# Allegro board prototype_board2_rev1.brd
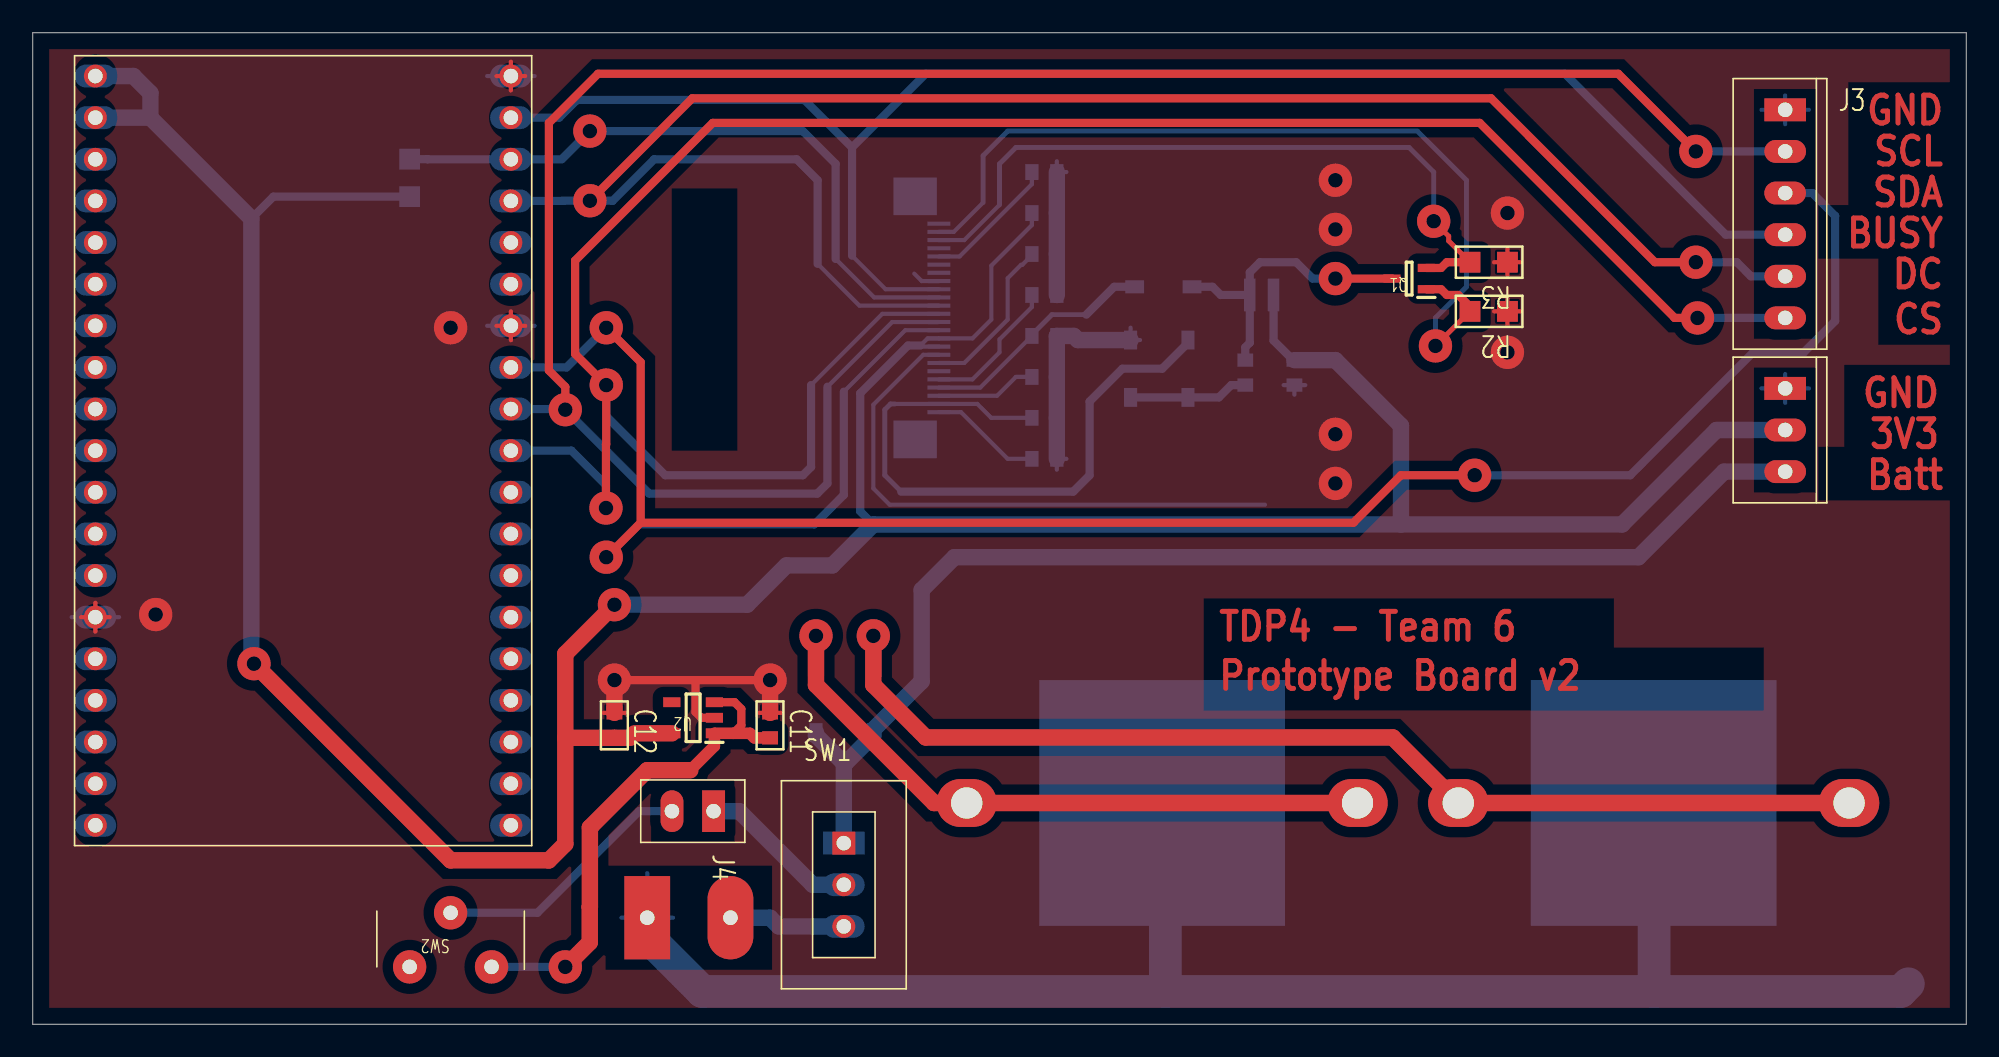
[diagram p0: board, top side]
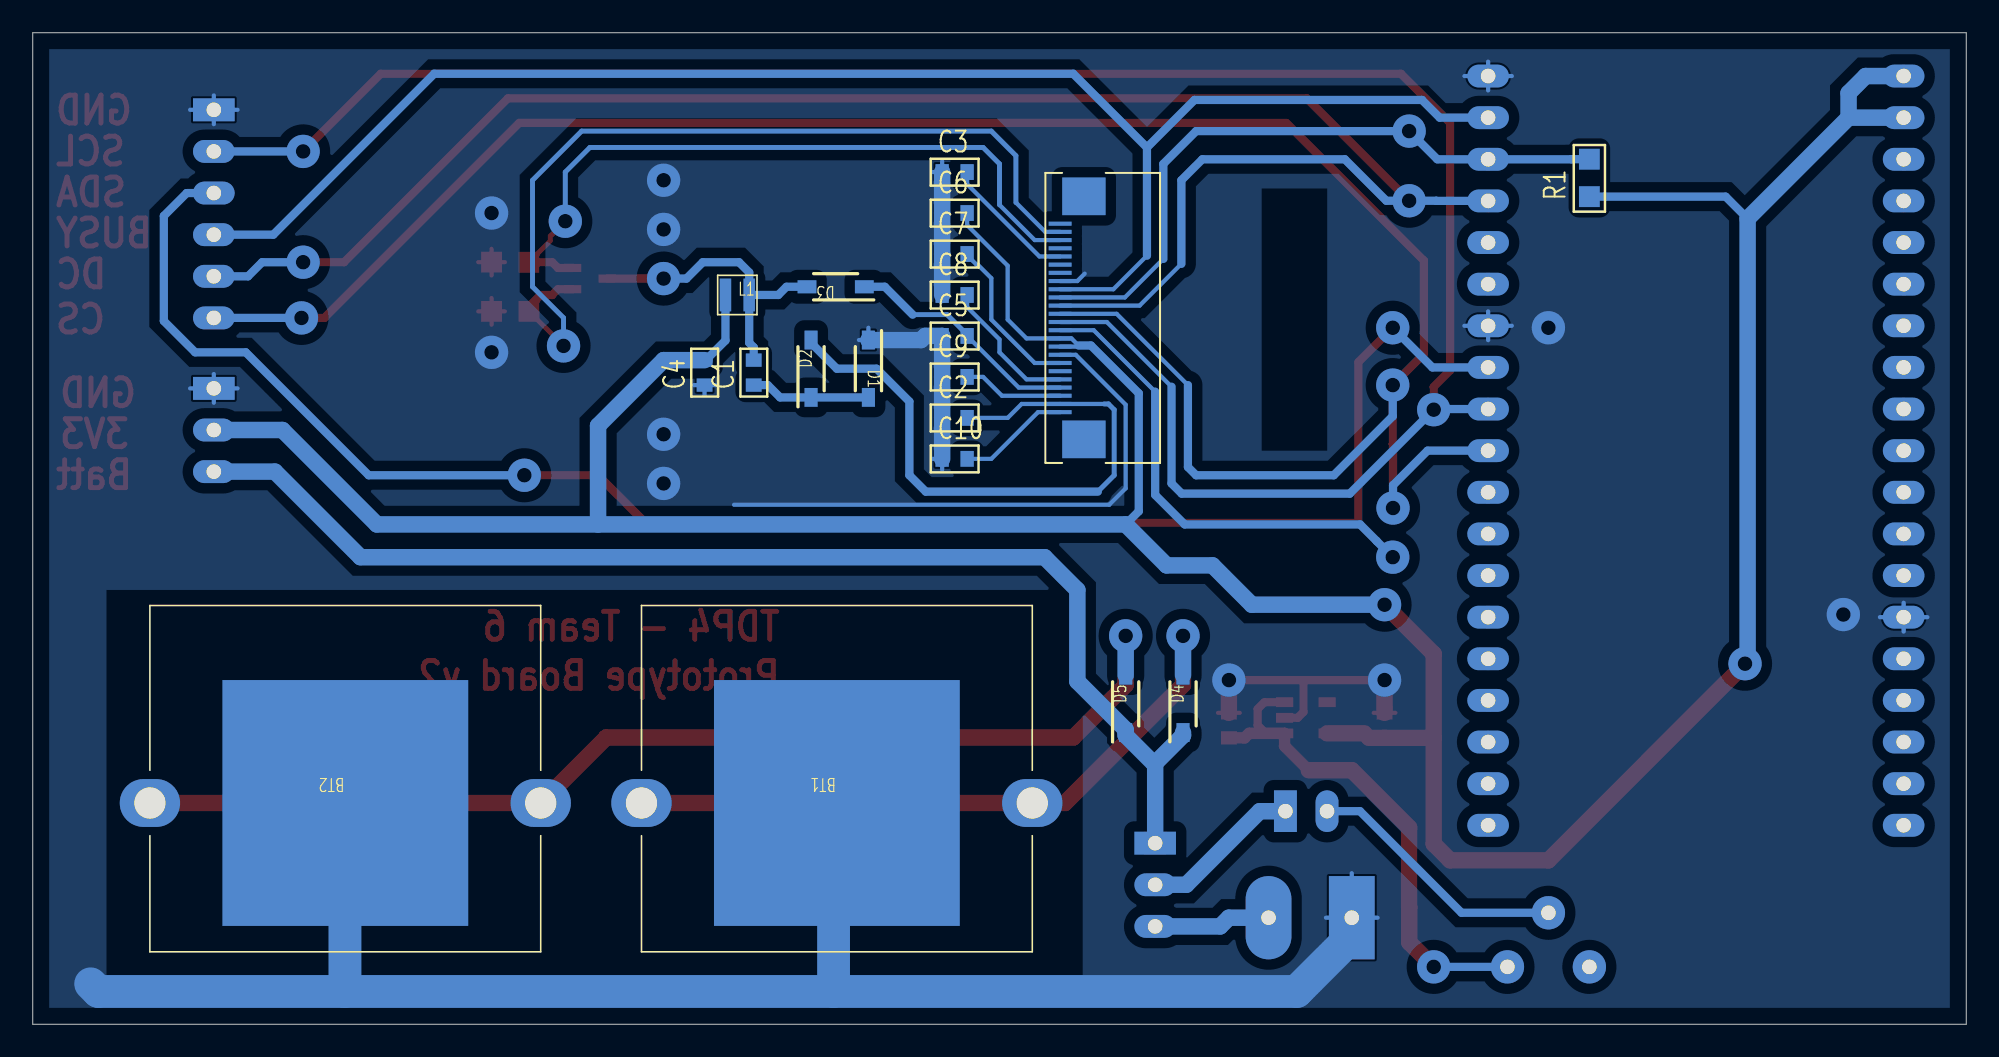
[diagram p1: board, bottom side, seen from below]

Outline 118 x 60.5 mm; copper layers: TOP, BOTTOM. Coordinates in mm from the lower left corner of the outline.
Outline path: 0,60.5 0,0 118,0 118,60.5 0,60.5

## Design rules (mm)
constraint set DEFAULT: min track width 0.254

## Placement (name value [footprint] x y rotation side)
BT1  Battery_Holder  [30212]  57 13.5 0 bottom
BT2  Battery_Holder  [30212]  87 13.5 0 bottom
C1  1u  [GU-C0603]  74 39 90 bottom
C2  1u / 50V  [GU-C0603]  62.5 37 180 bottom
C3  1u / 25V  [GU-C0603]  62.5 52 180 bottom
C4  4.7u  [GU-C0603]  77 39 90 bottom
C5  1u / 50V  [GU-C0603]  62.5 42 180 bottom
C6  1u / 25V  [GU-C0603]  62.5 49.5 180 bottom
C7  1u / 25V  [GU-C0603]  62.5 47 180 bottom
C8  1u / 25V  [GU-C0603]  62.5 44.5 180 bottom
C9  1u / 25V  [GU-C0603]  62.5 39.5 180 bottom
C10  1u / 25V  [GU-C0603]  62.5 34.5 180 bottom
C11  1u  [GU-C0603]  45 19 270 top
C12  1u  [GU-C0603]  35.5 19 270 top
D1  MBR0530T1  [SOD3716X135N]  67 40 270 bottom
D2  MBR0530T1  [SOD3716X135N]  70.5 40 90 bottom
D3  MBR0530T1  [SOD3716X135N]  69 45 0 bottom
D4  MBR0530T1  [SOD3716X135N]  47.8 19.55 90 bottom
D5  MBR0530T1  [SOD3716X135N]  51.3 19.55 90 bottom
J1  SFV24R-4STE1HLF  [AMPHENOL_SFV24R-4STE1HLF]  49.2 34.25 90 bottom
J2  VOLT TP  [GU-MOLEX3]  106.95 38.8 0 top
J3  SPI TP  [GU-MOLEX6]  106.95 55.8 0 top
J4  AMMETER TP  [GU-JUMPER2]  41.55 13 270 top
J5  EXT POWER  [GU-TERMINAL2-200]  37.5 6.5 90 top
L1  10uH  [NRH2412T2R2MNGH]  75 44.5 180 bottom
Q1  SI1308EDL-T1-BE3  [SOT65P210X110-3N]  84 45.5 180 top
R1  100k  [GU-R0805]  23 50.5 90 bottom
R2  10k  [GU-R0805]  90 43.5 180 top
R3  3R  [GU-R0805]  90 46.5 180 top
SW1  POWER SELECTOR  [GU-SW-SLIDE-SPDT]  49.5 11.05 0 top
SW2  -  [SSSS213100]  23 3.5 180 top
U1  ESP32-DevKitC  [ESP32-DEVKITC]  16.5 35 0 top
U2  MIC5317-3.3YM5-TR  [SOT95P280X100-5N]  40.3 18.7 180 top

## Library data of the parts
BT1 BT2 = Battery_Holder_9
C1-C12 = C
D1-D5 = MBR0530T1
J1 = SFV24R-4STE1HLF_0
J2 = CON3
J3 = CON6
J4 = JUMPER
J5 = CON2: User Part Number: TERMINAL2-200
L1 = L
Q1 = SI1308EDL-T1-BE3
R1-R3 = R
SW1 = SW SPDT
SW2 = SSSS213100
U1 = ESP32-DevKitC
U2 = MIC5317-3.3YM5-TR

## Footprints (pads in the part's own frame, mm; a bottom-side part is the same pattern mirrored in y, then rotated)
30212
  oval 3.683x2.921 hole 1.905: 1(0,0) 2(23.85,0)
  rect 15x15 smd: NP1(11.925,0)
AMPHENOL_SFV24R-4STE1HLF
  rect 2.3x2.65 smd: (1.44,4.65) (16.27,4.65)
  rect 0.25x1.4 smd: 1(3.1,6.1) 2(3.6,6.1) 3(4.1,6.1) 4(4.6,6.1) 5(5.1,6.1) 6(5.6,6.1) 7(6.1,6.1) 8(6.6,6.1) 9(7.1,6.1) 10(7.6,6.1) 11(8.1,6.1) 12(8.6,6.1) 13(9.1,6.1) 14(9.6,6.1) 15(10.1,6.1) 16(10.6,6.1) 17(11.1,6.1) 18(11.6,6.1) 19(12.1,6.1) 20(12.6,6.1) 21(13.1,6.1) 22(13.6,6.1) 23(14.1,6.1) 24(14.6,6.1)
ESP32-DEVKITC
  round 1.397 hole 0.889: 1(-12.68,22.86) 2(-12.68,20.32) 3(-12.68,17.78) 4(-12.68,15.24) 5(-12.68,12.7) 6(-12.68,10.16) 7(-12.68,7.62) 8(-12.68,5.08) 9(-12.68,2.54) 10(-12.68,0) 11(-12.68,-2.54) 12(-12.68,-5.08) 13(-12.68,-7.62) 14(-12.68,-10.16) 15(-12.68,-12.7) 16(-12.68,-15.24) 17(-12.68,-17.78) 18(-12.68,-20.32) 19(-12.68,-22.86) 20(12.68,-22.86) 21(12.68,-20.32) 22(12.68,-17.78) 23(12.68,-15.24) 24(12.68,-12.7) 25(12.68,-10.16) 26(12.68,-7.62) 27(12.68,-5.08) 28(12.68,-2.54) 29(12.68,0) 30(12.68,2.54) 31(12.68,5.08) 32(12.68,7.62) 33(12.68,10.16) 34(12.68,12.7) 35(12.68,15.24) 36(12.68,17.78) 37(12.68,20.32) 38(12.68,22.86)
GU-C0603
  rect 0.813x0.965 smd: 1(0,0) 2(1.524,0)
GU-JUMPER2
  rect 2.54x1.397 hole 0.889: 1(0,0)
  oval 2.54x1.397 hole 0.889: 2(0,-2.54)
GU-MOLEX3
  rect 2.54x1.397 hole 0.889: 1(0,0)
  oval 2.54x1.397 hole 0.889: 2(0,-2.54) 3(0,-5.08)
GU-MOLEX6
  rect 2.54x1.397 hole 0.889: 1(0,0)
  oval 2.54x1.397 hole 0.889: 2(0,-2.54) 3(0,-5.08) 4(0,-7.62) 5(0,-10.16) 6(0,-12.7)
GU-R0805
  rect 1.27x1.27 smd: 1(0,0) 2(2.286,0)
GU-SW-SLIDE-SPDT
  rect 1.397x1.397 hole 0.889: 1(0,0)
  round 1.397 hole 0.889: 2(0,-2.54) 3(0,-5.08)
GU-TERMINAL2-200
  rect 5.08x2.794 hole 0.889: 1(0,0)
  oval 5.08x2.794 hole 0.889: 2(0,-5.08)
NRH2412T2R2MNGH
  rect 0.7x2 smd: 1(-0.725,0) 2(0.725,0)
SOD3716X135N
  rect 1.15x0.8 smd: 1(-1.75,0) 2(1.75,0)
SOT65P210X110-3N
  rect 1.05x0.5 smd: 1(-1.05,0.65) 2(-1.05,-0.65) 3(1.05,0)
SOT95P280X100-5N
  rect 1.05x0.6 smd: 1(-1.3,0.95) 2(-1.3,0) 3(-1.3,-0.95) 4(1.3,-0.95) 5(1.3,0.95)
SSSS213100
  round 2.032 hole 0.889: 1(0,0) 2(-2.5,-3.3) 3(-5,0)

## Nets
3V3: C4.2 C6.2 C12.2 J1.9 J1.10 J2.2 L1.1 R1.1 U1.1 U1.2 U2.5(VOUT)
GND: BT1.NP1 BT2.NP1 C2.1 C3.1 C4.1 C5.1 C6.1 C7.1 C8.1 C9.1 C10.1 C11.1 C12.1 D1.1(C) J1.8 J1.17 J2.1 J3.1 J5.1 R2.1 R3.1 U1.14 U1.32 U1.38 U2.2
VCC: C11.2 SW2.3(NO) U2.1 U2.3
BATT: D4.1(C) D5.1(C) J2.3 SW1.1
BUSY: J1.16 J3.4 U1.37
DC: J1.14 J3.5 U1.35
E-INK_CS: J1.13 J3.6 U1.29
EXT: J5.2 SW1.3(NO)
GDR: J1.23 Q1.1 R2.2
RESE: J1.22 Q1.2(S) R3.2
RESET: J1.15 R1.2 U1.36
SCL: J1.12 J3.2 U1.30
SDA: J1.11 J3.3 U1.31
VGH: C5.2 D3.1(C) J1.4
VGL: C2.2 D2.2 J1.2
N09940: C1.2 D3.2 L1.2 Q1.3
N26254: C1.1 D1.2 D2.1(C)
N26834: C10.2 J1.1
N27155: C9.2 J1.3
N27189: C8.2 J1.5
N27231: C7.2 J1.7
N27307: C3.2 J1.20
N33521: J4.1 SW1.2
N36276: J4.2 SW2.2
N72588: BT2.1 BT2.2 D5.2
N72605: BT1.1 BT1.2 D4.2

Pads without a net: J1 6 18 19 21 24; SW2 1; U1 3 4 5 6 7 8 9 10 11 12 13 15 16 17 18 19 20 21 22 23 24 25 26 27 28 33 34; U2 4

## Via types
v1: diameter 2.032, hole 0.889, TOP to BOTTOM, 29 vias

## Routing (per net, layer and track width the routed paths; a pad name or vN(x,y) marks a point on that pad's centre or on a via; arc(x,y) is an arc through that point)
3V3: length 223.1
  TOP w0.7: 36.46,17.48 36.73,17.75
  TOP w1: 36.46,17.48 C12.2 32.5,17.48 ; 32.5,17.48 32.5,22.6 v1(35.5,25.6) ; 32.5,17.48 32.5,11 31.5,10 25.5,10 v1(13.5,22) ; 36.73,17.75 U2.5
  BOTTOM w0.254: C6.2 60.98,48.76 58.5,46.29 58.5,43 57.35,41.85 J1.10 54.61,41.85 54.18,41.42 54.24,41.35 J1.9
  BOTTOM w0.5: L1.1 75.72,41.72 76.92,40.52 C4.2 ; 13.34,49.16 14.68,50.5 R1.1 ; 51.3,30.5 50.5,31.3 50.5,38.5 53.42,41.42 54.18,41.42
  BOTTOM w1: 83.5,30.5 51.3,30.5 48.8,28 46,28 43.6,25.6 v1(35.5,25.6) ; 83.5,30.5 97,30.5 102.76,36.26 J2.2 ; 83.5,30.5 83.5,36.52 79.5,40.52 C4.2 ; U1.2 7.18,55.32 ; 7.18,55.32 13.34,49.16 13.34,22.16 v1(13.5,22) ; 7.18,55.32 7.18,56.82 6.14,57.86 U1.1
GND: length 230.3
  TOP w0.254: 3.82,23.96 U1.14 ; U1.14 3.82,25.72 ; U1.14 2.94,24.84 ; U1.14 4.7,24.84 ; U1.32 29.18,43.5 ; U1.32 29.18,41.74 ; U1.32 30.06,42.62 ; U1.32 28.3,42.62 ; 34.84,19 C12.1 36.16,19 ; U1.38 29.18,58.74 ; U1.38 29.18,56.98 ; U1.38 28.3,57.86 ; U1.38 30.06,57.86 ; 89.19,43.5 R2.1 ; R2.1 90,44.31 ; R2.1 90.81,43.5 ; R2.1 90,42.69 ; 89.19,46.5 R3.1 ; R3.1 90,47.31 ; R3.1 90,45.69 ; R3.1 90.81,46.5 ; 44.34,19 C11.1 45.66,19
  TOP w0.5: U2.2 40.8,18.7 40.45,19.05 40.45,20.95 40.5,21 ; 40.5,21 v1(45,21) ; 40.5,21 v1(35.5,21)
  TOP w1: C11.1 v1(45,21) ; C12.1 v1(35.5,21)
  BOTTOM w0.254: 29.18,41.74 U1.32 ; U1.32 29.18,43.5 ; U1.32 30.63,42.62 ; U1.32 27.73,42.62 ; 35.92,6.5 J5.1 ; J5.1 37.5,9.22 ; J5.1 39.08,6.5 ; J2.1 108.4,38.8 ; J2.1 106.95,39.68 ; J2.1 106.95,37.92 ; J2.1 105.5,38.8 ; U1.38 30.63,57.86 ; U1.38 29.18,56.98 ; U1.38 27.73,57.86 ; U1.38 29.18,58.74 ; 105.5,55.8 J3.1 ; J3.1 106.95,56.68 ; J3.1 106.95,54.92 ; J3.1 108.4,55.8 ; 62.5,33.84 C10.1 63.08,34.5 ; 76.34,39 C4.1 ; C4.1 77,38.42 ; C4.1 77.66,39 ; 67.58,41.75 D1.1 67,42.5 ; J1.17 54.25,45.35 53.8,45.8 ; 63.08,52 C3.1 62.5,52.66 ; 2.37,24.84 U1.14 ; U1.14 3.82,25.72 ; U1.14 3.82,23.96 ; U1.14 5.27,24.84 ; BT1.NP1 69.12,13.5 ; 99.08,13.5 BT2.NP1 ; 75.2,31.7 52.3,31.7 51.3,32.7 51.3,37.8 54.35,40.85 J1.8
  BOTTOM w1: C3.1 C6.1 C7.1 C8.1 ; C10.1 C2.1 C9.1 C5.1 63.53,42 63.78,41.75 D1.1 ; 114.5,2.5 114.47,2.47
  BOTTOM w2: 98.95,2 114,2 114.47,2.47 ; 98.95,2 69.12,2 ; 98.95,2 98.95,10.37 98.92,10.39 BT2.NP1 ; 69.12,2 40.86,2 37.5,5.36 J5.1 ; 69.12,2 69.12,13.5
  vias: v1(7.5,25) v1(25.5,42.5) v1(79.5,51.5) v1(79.5,48.5) v1(79.5,36) v1(79.5,33) v1(90,49.5) v1(90,41)
VCC: length 31.1
  TOP w0.5: 42.75,17.75 43.24,18.25 43.24,19.23 42.83,19.65 U2.3
  TOP w0.7: C11.2 44.04,17.48 43.77,17.75 U2.1 41.6,16.97 40.13,15.5
  TOP w1: v1(32.5,3.5) 33.99,4.99 33.99,7.14 34,7.15 34,12 37.5,15.5 40.13,15.5
  BOTTOM w0.5: v1(32.5,3.5) SW2.3
BATT: length 75.7
  BOTTOM w1: 49.5,15.92 47.8,17.62 D4.1 ; 49.5,15.92 SW1.1 ; 49.5,15.92 49.6,15.92 51.3,17.62 D5.1 51.3,17.97 54.25,20.92 54.25,26.5 56.25,28.5 98,28.5 103.22,33.72 J2.3
BUSY: length 98.1
  BOTTOM w0.254: 50,46.9 52.05,44.85 J1.16
  BOTTOM w0.5: J3.4 103.32,48.18 93.5,58 54.5,58 50,53.5 ; 50,53.5 50,46.9 ; 50,53.5 47.1,56.4 33.21,56.4 32.13,55.32 U1.37
DC: length 113.9
  TOP w0.5: v1(34,50.25) 40.25,56.5 89,56.5 99,46.5 v1(101.5,46.5)
  BOTTOM w0.254: 47.9,46.4 50.45,43.85 J1.14
  BOTTOM w0.5: 47.9,46.4 47.9,51.5 46.62,52.78 37.92,52.78 35.39,50.25 v1(34,50.25) 32.36,50.25 32.35,50.24 U1.35 ; J3.5 104.86,45.64 104,46.5 v1(101.5,46.5)
E-INK_CS: length 136.9
  TOP w0.5: v1(101.6,43.1) 100.21,43.1 88.31,55 41.5,55 33.1,46.6 33.1,40.9 v1(35,39) 35,35.4 34.98,35.38 v1(34.98,31.5)
  BOTTOM w0.254: J1.13 51.85,43.35 47.5,39
  BOTTOM w0.5: U1.29 32.88,35 34.98,32.89 v1(34.98,31.5) ; 47.5,39 47.5,34 47,33.5 38.6,33.5 35,37.1 v1(35,39) ; J3.6 v1(101.6,43.1)
EXT: length 7.1
  BOTTOM w1: J5.2 45,6.5 45.53,5.97 SW1.3
GDR: length 54.9
  TOP w0.3: v1(85.61,41.39) R2.2
  TOP w0.5: Q1.1 85.95,44.85 86.3,44.5 87,44.5 87.71,43.79 R2.2
  BOTTOM w0.254: 58,50.14 56.21,48.35 J1.23
  BOTTOM w0.3: 58,50.14 58,53 59.5,54.5 84.5,54.5 87.5,51.5 87.5,45 85.61,43.11 v1(85.61,41.39)
RESE: length 43.9
  TOP w0.3: R3.2 86.41,47.8 86.41,48.09 v1(85.5,49)
  TOP w0.5: Q1.2 85.95,46.15 86.3,46.5 R3.2
  BOTTOM w0.254: J1.22 56.85,47.85 59,50
  BOTTOM w0.3: 59,50 59,52.5 60,53.5 84,53.5 85.5,52 v1(85.5,49)
RESET: length 40.6
  BOTTOM w0.254: J1.15 51.35,44.35 49,46.7
  BOTTOM w0.5: 49,46.7 49,52.5 47,54.5 v1(34,54.5) 32.28,52.78 U1.36 24.1,52.78 24.09,52.79 R1.2
SCL: length 132.6
  TOP w0.5: v1(101.5,53.26) 96.76,58 34.5,58 31.5,55 31.5,39.89 32.5,38.89 v1(32.5,37.5)
  BOTTOM w0.254: J1.12 52.45,42.85 48.5,38.9
  BOTTOM w0.5: U1.30 32.46,37.54 v1(32.5,37.5) 37.62,32.38 47.88,32.38 48.5,33 48.5,38.9 ; J3.2 v1(101.5,53.26)
SDA: length 140.3
  TOP w0.5: v1(35,42.5) 37.1,40.4 37.1,30.6 ; 37.1,30.6 80.6,30.6 83.5,33.5 v1(88,33.5) ; 37.1,30.6 v1(35,28.5)
  BOTTOM w0.254: J1.11 53.25,42.35 49.5,38.6
  BOTTOM w0.5: U1.31 32.58,40.08 v1(35,42.5) ; J3.3 108.61,50.72 110,49.33 110,42.91 108.09,41 105,41 97.5,33.5 v1(88,33.5) ; 49.5,38.6 49.5,32.3 47.7,30.5 36.99,30.5 35.98,29.49 35.98,29.48 v1(35,28.5)
VGH: length 14.5
  BOTTOM w0.254: J1.4 57.83,38.85 C5.2
  BOTTOM w0.3: C5.2 60.98,42.08 62.2,43.3 64.3,43.3
  BOTTOM w0.5: 64.3,43.3 66,45 D3.1
VGL: length 39
  BOTTOM w0.254: C2.2 58.5,37 57.65,37.85 J1.2 52.6,37.85
  BOTTOM w0.3: 53,32.5 52,33.5 52,37.5 52.35,37.85 52.6,37.85
  BOTTOM w0.5: D2.2 70.5,41.58 68.92,40 66.5,40 64.5,38 64.5,33.5 63.5,32.5 53,32.5
N09940: length 18.5
  TOP w0.5: Q1.3 v1(79.5,45.5)
  BOTTOM w0.5: L1.2 74.28,41.58 74,41.31 C1.2 ; L1.2 74.28,45.88 74.9,46.5 77.11,46.5 78.11,45.5 v1(79.5,45.5) ; L1.2 72.5,44.5 72,45 D3.2
N26254: length 7.3
  BOTTOM w0.5: D1.2 D2.1 72.39,38.25 73.14,39 C1.1
N26834: length 6.9
  BOTTOM w0.254: J1.1 56.65,37.35 59.5,34.5 C10.2
N27155: length 6.2
  BOTTOM w0.254: J1.3 58.85,38.35 60,39.5 C9.2
N27189: length 8.7
  BOTTOM w0.254: C8.2 60.98,43.76 59,41.79 59,41 57.35,39.35 J1.5
N27231: length 10
  BOTTOM w0.254: C7.2 60.98,46.92 60.39,46.34 60.31,46.34 59.5,45.52 59.5,43 56.85,40.35 J1.7
N27307: length 8.2
  BOTTOM w0.254: J1.20 56.56,46.85 60.98,51.26 C3.2
N33521: length 9.8
  BOTTOM w1: J4.1 43.11,13 47.6,8.51 SW1.2
N36276: length 16.1
  BOTTOM w0.5: J4.2 37,13 30.8,6.8 SW2.2
N72588: length 68.1
  TOP w1: v1(51.3,23.7) 51.3,20.7 54.5,17.5 83,17.5 BT2.1 BT2.2 111,13.5
  BOTTOM w1: D5.2 v1(51.3,23.7)
N72605: length 41.6
  TOP w1: 81,13.5 BT1.2 BT1.1 55,13.5 47.8,20.7 v1(47.8,23.7)
  BOTTOM w1: D4.2 v1(47.8,23.7)

## Copper pours and planes (outline as drawn; the poured copper is in the pictures)
GND on TOP: 1,59.5 117,59.5 117,1 1,1
GND on BOTTOM: 1,59.5 117,59.5 117,1 113.5,1 113.5,26.5 53.92,26.5 53.92,1 1,1

## Text on the board
TOP: TDP4 - Team 6 | Prototype Board v2 | GND | 3V3 | SCL | SDA | BUSY | DC | CS | Batt
